# EAGLE board Friendship Pendant (EAGLE 9.5.1)
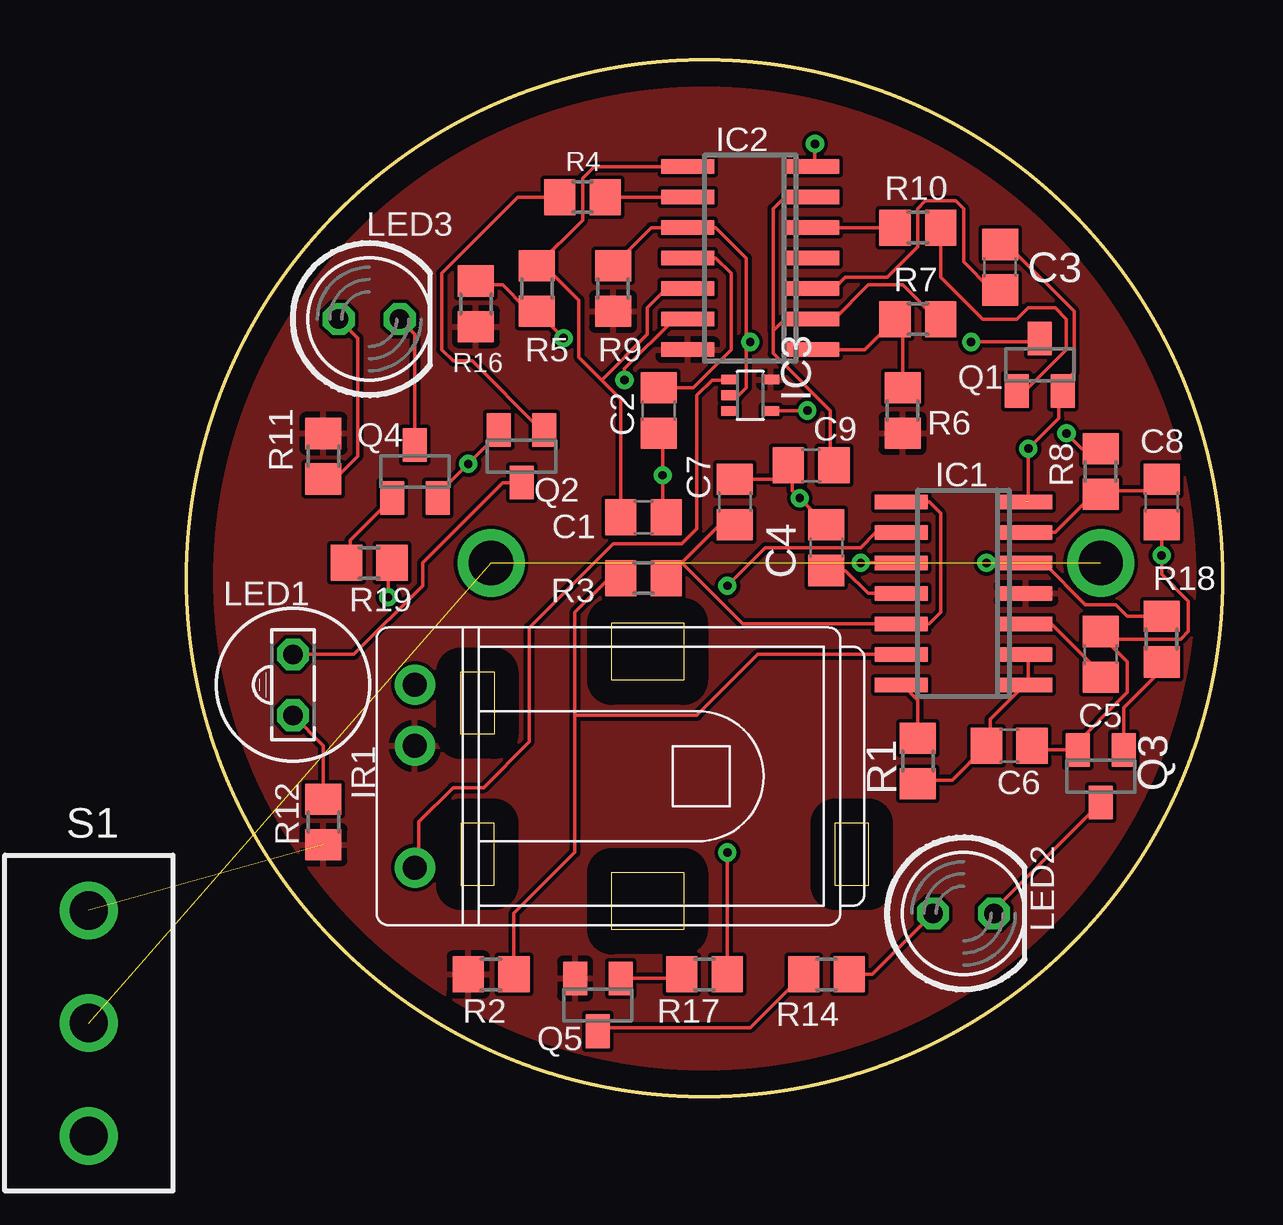
[diagram p0: board, top side]
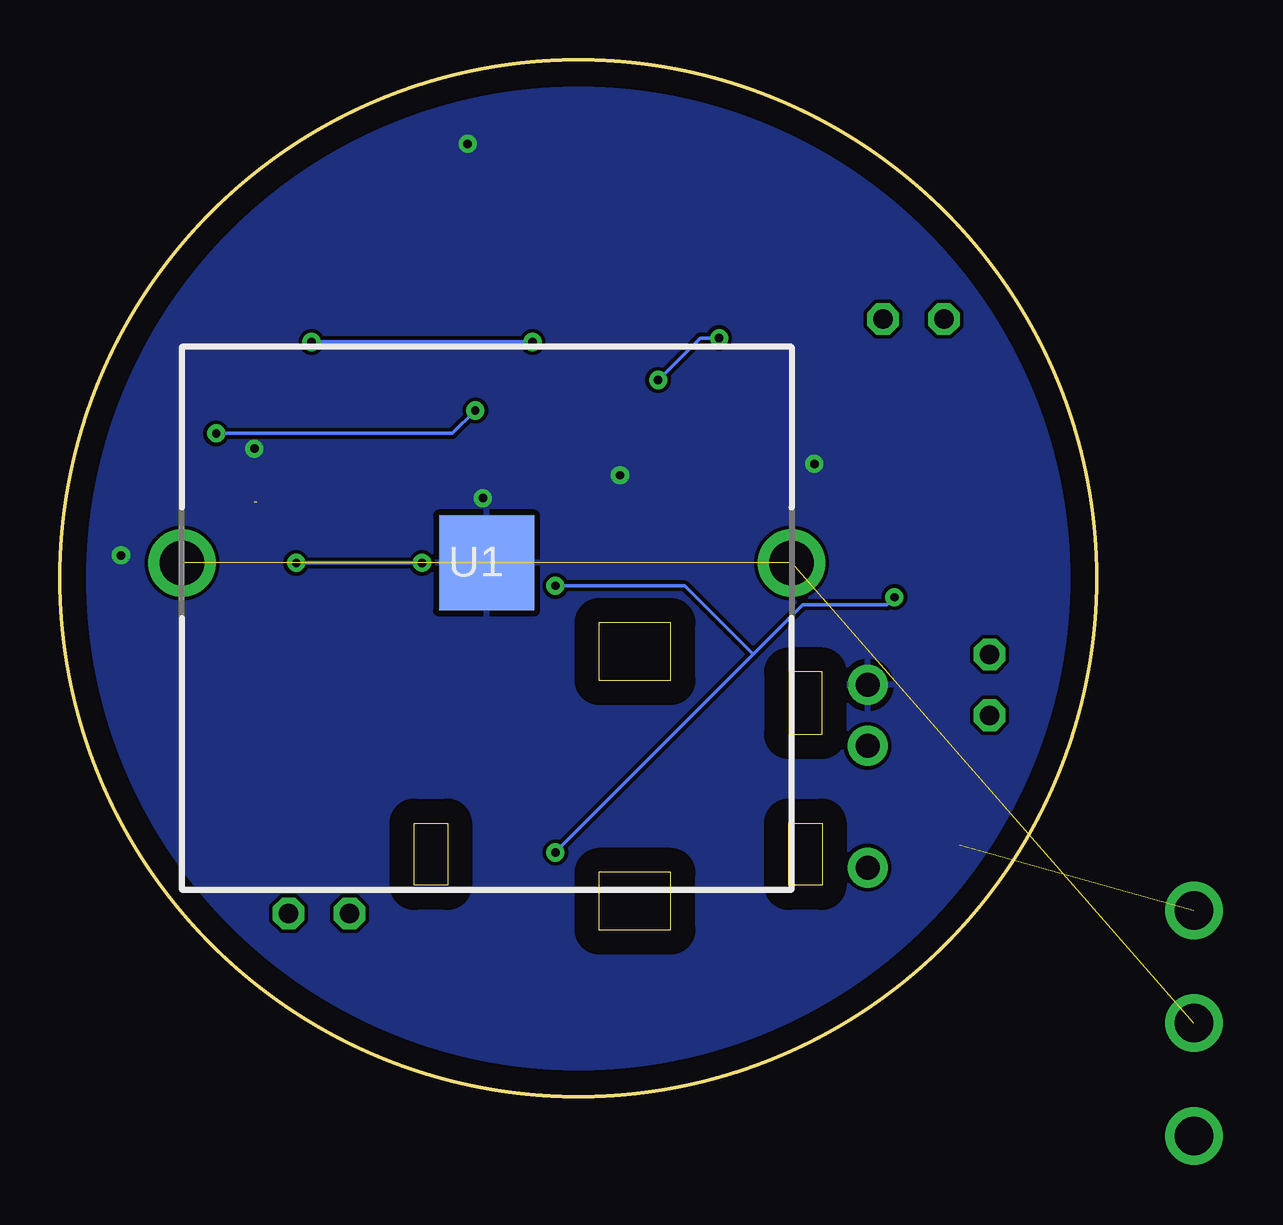
[diagram p1: board, bottom side, seen from below]

Size 43.18 x 43.18 mm. Coordinates in mm from the lower left corner, seen from the top.
Outline: circle at 21.59,21.59 radius 21.59
Copper layers (1*16): Top 0.035mm / dielectric 1.5mm / Bottom 0.035mm
Design rules "default": minimum track width 6mil, minimum drill 0.35mm, track to track 6mil, track to pad 6mil, pad to pad 6mil, via to via 6mil, smd to smd 6mil, copper to edge 40mil, drill to drill 6mil, minimum pad ring 10mil, minimum via ring 8mil, stop-mask expansion 4mil, vias tented up to drill 0mil, thermal gap 10mil

## Footprints (pad centres in the part's own frame; a part is rotated, then mirrored left to right if it is on the bottom)
C0805 = smd 1.3 x 1.5: 1 -0.95,0; 2 0.95,0
SO14 = smd 0.6 x 2.2: 1 -3.81,-2.6; 2 -2.54,-2.6; 3 -1.27,-2.6; 4 0,-2.6; 5 1.27,-2.6; 6 2.54,-2.6; 7 3.81,-2.6; 8 3.81,2.6; 9 2.54,2.6; 10 1.27,2.6; 11 0,2.6; 12 -1.27,2.6; 13 -2.54,2.6; 14 -3.81,2.6
SC70-5 = smd 0.4 x 0.7: 1 -0.65,-0.85; 2 0,-0.85; 3 0.65,-0.85; 4 0.65,0.85; 5 -0.65,0.85
TSOP17_TB1 = drill 1 pad 1.676: GND 0,-3.81; VO 0,3.81; VS 0,-1.27
IRL80A = drill 0.813 octagon: A 0,-1.27; K 0,1.27
LED5MM = drill 0.813 octagon: A -1.27,0; K 1.27,0
SOT23 = smd 1 x 1.4: 1 -0.95,-1.1; 2 0.95,-1.1; 3 0,1.1
R0805 = smd 1.3 x 1.5: 1 -0.95,0; 2 0.95,0
CS12ANW03 = drill 1.6 pad 2.37: 1 0,-4.7; 2 0,0; 3 0,4.7
3039 = drill 1.85 pad 2.8: 1 -12.7,0; 2 12.7,0 | smd 3.96 x 3.96: 3 0,0

## Placement (x,y rotation side)
C1  .01uF  [C0805]  19.05,24.13 0 top
C2  .01uF  [C0805]  19.68,28.58 270 top
C3  .01uF  [C0805]  33.91,34.54 90 top
C4  .01uF  [C0805]  26.67,22.86 90 top
C5  .01uF  [C0805]  38.1,18.42 90 top
C6  100uF  [C0805]  34.29,14.61 0 top
C7  100uF  [C0805]  22.86,24.77 90 top
C8  1uF  [C0805]  40.64,24.77 270 top
C9  4.7uF  [C0805]  26.04,26.29 180 top
IC1  LM556D  [SO14]  32.38,20.96 90 top
IC2  LM556D  [SO14]  23.5,34.92 90 top
IC3  74AHC1G32DCK  [SC70-5]  23.5,29.21 270 top
IR1  TSOP1730TB1  [TSOP17_TB1]  9.52,13.34 180 top
LED1  [IRL80A]  4.44,17.14 0 top
LED2  [LED5MM]  32.38,7.62 0 top
LED3  [LED5MM]  7.62,32.39 0 top
Q1  [SOT23]  35.56,30.48 0 top
Q2  [SOT23]  13.97,26.67 180 top
Q3  [SOT23]  38.1,13.34 180 top
Q4  [SOT23]  9.52,26.04 0 top
Q5  [SOT23]  17.14,3.81 180 top
R1  28.7K  [R0805]  30.48,13.97 90 top
R2  1.1K  [R0805]  12.7,5.08 180 top
R3  3.65K  [R0805]  19.05,21.59 180 top
R4  10K  [R0805]  16.51,37.47 180 top
R5  1.87K  [R0805]  14.61,33.66 270 top
R6  619K  [R0805]  29.84,28.58 270 top
R7  1.24K  [R0805]  30.48,32.39 180 top
R8  562  [R0805]  38.1,26.04 90 top
R9  1K  [R0805]  17.78,33.66 90 top
R10  10K  [R0805]  30.48,36.2 0 top
R11  30  [R0805]  5.71,26.67 90 top
R12  30  [R0805]  5.71,11.43 270 top
R14  15  [R0805]  26.67,5.08 180 top
R16  1K  [R0805]  12.07,33.02 90 top
R17  10K  [R0805]  21.59,5.08 180 top
R18  10K  [R0805]  40.64,19.05 270 top
R19  10K  [R0805]  7.62,22.23 180 top
S1  CS12ANW03  [CS12ANW03]  -4.06,3.05 0 top  (outside the outline)
U1  3039  [3039]  25.4,22.23 0 bottom

## Library data of the parts
C1 = rcl; MOUSER#: 603-CC0805JRX7R9BB103; MPN: CC0805JRX7R9BB103; SPICEPREFIX: C
C2-C5 = rcl; MOUSER#: 603-CC0805KRX7R9BB103; MPN: CC0805KRX7R9BB103; SPICEPREFIX: C
C6 C7 = rcl; MOUSER#: 81-GRM31CR60J107KE39L; MPN: GRM31CR60J107KE39L; SPICEPREFIX: C
C8 = rcl; MOUSER#: 80-C0805C105K3R; MPN: C0805C105K3R; SPICEPREFIX: C
C9 = rcl; MOUSER#: 791-0805X475M250CT; MPN: 0805X475M250CT; SPICEPREFIX: C
IC1 IC2 = linear
IC3 = 74xx-little-us; MOUSER#: 595-SN74AUP1G32DCKR; MPN: SN74AUP1G32DCKR
IR1 = telefunken; MOUSER#: 78-TSOP31330; MPN: TSOP31330; OC_FARNELL: unknown; OC_NEWARK: unknown
LED1 = led; MOUSER#: 782-TSAL6200; MPN: TSAL6200
LED2 = led; MOUSER#: 859-LTL-307GLC; MPN: LTL-307GLC
LED3 = led; MOUSER#: 645-521-9672F; MPN: 521-9672F
Q1-Q4 = semicon-smd-ipc; MOUSER#: 726-BCW66KHE6327HTSA1; MPN: BCW66KHE6327HTSA1; SPICEPREFIX: Q
Q5 = semicon-smd-ipc
R1 = rcl; MOUSER#: 652-CR0805-FX-2872ELF; MPN: CR0805-FX-2872ELF; SPICEPREFIX: R
R2 = rcl; MOUSER#: 652-CR0805-FX-1101ELF; MPN: CR0805-FX-1101ELF; SPICEPREFIX: R
R3 = rcl; MOUSER#: 652-CR0805-FX-3651ELF; MPN: CR0805-FX-3651ELF; SPICEPREFIX: R
R4 R10 R17-R19 = rcl; MOUSER#: 652-CR0805-FX-1002ELF; MPN: CR0805-FX-1002ELF; SPICEPREFIX: R
R5 = rcl; MOUSER#: 652-CR0805-FX-1871ELF; MPN: CR0805-FX-1871ELF; SPICEPREFIX: R
R6 = rcl; MOUSER#: 652-CR0805-FX-6193ELF; MPN: CR0805-FX-6193ELF; SPICEPREFIX: R
R7 = rcl; MOUSER#: 652-CR0805-FX-1241ELF; MPN: CR0805-FX-1241ELF; SPICEPREFIX: R
R8 = rcl; MOUSER#: 652-CR0805-FX-5620ELF; MPN: CR0805-FX-5620ELF; SPICEPREFIX: R
R9 R16 = rcl; MOUSER#: 652-CR0805-FX-1001ELF; MPN: CR0805-FX-1001ELF; SPICEPREFIX: R
R11 R12 = rcl; MOUSER#: 652-CR0805-JW-300ELF; MPN: CR0805-JW-300ELF; SPICEPREFIX: R
R14 = rcl; MOUSER#: 652-CR0805-FX-15R0ELF; MPN: CR0805-FX-15R0ELF; SPICEPREFIX: R
S1 = CS12ANW03; ALLIED_NUMBER: 70228233; ALLIED_PRICE-STOCK: https://www.alliedelec.com/nkk-switches-cs12anw03/70228233/; DESCRIPTION: NKK SWITCHES - CS12ANW03 - SWITCH, SLIDE, SPDT, 3A, 250V, TH; HEIGHT: mm; MANUFACTURER_NAME: NKK Switches; MANUFACTURER_PART_NUMBER: CS12ANW03; MOUSER_PART_NUMBER: 633-CS12ANW03; MOUSER_PRICE-STOCK: https://www.mouser.com/Search/Refine.aspx?Keyword=633-CS12ANW03; RS_PART_NUMBER: 1251847; RS_PRICE-STOCK: http://uk.rs-online.com/web/p/products/1251847
U1 = 3039; DESCRIPTION: Coin Cell Battery Holders THM COIN CELL CLIP; HEIGHT: mm; MANUFACTURER_NAME: Keystone Electronics; MANUFACTURER_PART_NUMBER: 3039; MOUSER_PART_NUMBER: 534-3039; MOUSER_PRICE-STOCK: https://www.mouser.com/Search/Refine.aspx?Keyword=534-3039

## Nets
0: C1.2 C2.2 C3.2 C4.2 C5.2 C6.2 C7.2 C8.2 C9.2 IC1.7 IC2.7 IR1.GND Q1.2 Q2.2 Q3.2 Q4.2 U1.3
BLINK: IC1.9 R17.1 R19.1
ENABLE: IC1.5 IC1.10 R18.1
GND: IC3.3
N$1: IC1.13 R2.1 R3.2
N$2: IC2.1 R6.1 R7.2
N$3: IC3.4 R8.2
N$4: IC2.10 IC3.2 Q1.3 R9.2
N$5: LED1.A R12.1
N$6: Q3.1 R18.2
N$7: Q4.1 R19.2
N$8: Q5.1 R17.2
N$9: LED1.K Q2.3
N$10: Q2.1 R4.2
N$11: IC3.1 IR1.VO
N$12: Q1.1 R10.2
N$13: IC2.5 R10.1
N$14: C3.1 IC2.3
N$15: S1.2 U1.1 U1.2
N$16: C9.1 IC2.2 IC2.6 R7.1
N$17: C8.1 IC1.6 R8.1
N$18: C5.1 IC1.3
N$19: C6.1 IC1.1 IC1.2 R1.1
N$21: IC1.14 R1.2
N$23: C4.1 IC1.11
N$24: C7.1 IC1.8 IC1.12 R3.1
N$27: LED3.A R11.1
N$28: LED3.K Q4.3
N$29: Q5.3 R14.2
N$30: LED2.A R14.1
N$31: LED2.K Q3.3
N$34: C2.1 IC2.11
N$35: C1.1 IC2.8 IC2.12 R5.1
N$36: IC2.13 R5.2 R16.2
SIGNAL: IC2.9 R4.1
VCC: IC1.4 IC2.14 IC3.5 IR1.VS Q5.2 R2.2 R6.2 R9.1 R11.2 R12.2 R16.1 S1.3

## Tracks (layer width: path | path; a pad name or v marks a point on that pad's centre or on a via)
0  (via drill 0.35)  (1 unrouted)
  Top 0.152: 35.08,24.77 v35.08,26.99 36.35,28.26 36.35,29.37 Q1.2 36.35,29.53 36.99,30.16 36.99,32.7 34.29,35.4 33.97,35.4 C3.2 | 25.24,25.72 25.24,26.19 C9.2 25.24,25.72 | 25.24,25.72 25.24,25.24 v25.56,24.92 C4.2 | 25.24,25.72 C7.2 | Q4.2 10.48,25.08 v11.75,26.35 13.02,27.62 Q2.2 | C1.2 19.84,24.13 v19.84,25.88 19.84,27.46 C2.2 | C8.2 v40.64,22.54 40.64,21.75 41.75,20.64 41.75,19.37 41.43,19.05 38.26,19.05 | 36.83,14.45 35.4,14.45 C6.2 | 36.83,14.45 Q3.2 36.83,14.45 | 38.26,19.05 39.21,18.1 39.21,16.83 36.83,14.45 | 38.26,19.05 38.1,19.21 C5.2 38.26,19.05 | v26.19,39.69 26.19,38.73 IC2.7
  pour Bottom: -0.25,21.72 -0.25,12.57 13.08,-0.76 30.23,-0.76 43.94,12.95 43.94,30.48 30.99,43.43 12.32,43.43 1.27,32.39 -0.25,30.86
BLINK  (via drill 0.35)
  Top 0.152: v22.54,10.16 R17.1 | v8.41,20.8 8.41,22.23 R19.1 | IC1.9 28.73,23.5 28.1,22.86 24.13,22.86 v22.54,21.27
  Bottom 0.152: 14.29,18.42 12.22,20.48 8.73,20.48 v8.41,20.8 | 14.29,18.42 v22.54,10.16 | v22.54,21.27 17.14,21.27 14.29,18.42
ENABLE  (via drill 0.35)
  Top 0.152: R18.1 39.21,20 38.73,20.48 37.47,20.48 35.72,22.23 IC1.5 v33.34,22.23 | v28.1,22.23 IC1.10
  Bottom 0.152: v33.34,22.23 v28.1,22.23
N$1
  Top 0.152: 16.19,15.88 16.19,20.16 17.62,21.59 R3.2 | 16.19,15.88 16.19,10.16 13.65,7.62 R2.1 | IC1.13 23.81,18.42 21.27,15.88 16.19,15.88
N$2
  Top 0.152: R6.1 29.84,32.23 29.69,32.39 R7.2 28.26,31.12 IC2.1
N$3  (via drill 0.35)
  Top 0.152: v25.88,28.58 24.45,28.58 IC3.4 | v36.67,27.62 37.31,26.99 R8.2
  Bottom 0.152: v25.88,28.58 26.83,27.62 v36.67,27.62
N$4  (via drill 0.35)
  Top 0.152: IC3.2 23.02,29.21 23.34,29.53 23.34,31.43 | 23.34,31.43 23.34,34.92 22.07,36.2 IC2.10 19.37,36.2 R9.2 | v32.7,31.43 35.56,31.43 Q1.3 | 23.34,31.43 v23.5,31.43
  Bottom 0.152: v23.5,31.43 v32.7,31.43
N$5
  Top 0.152: R12.1 5.71,14.61 LED1.A
N$6
  Top 0.152: R18.2 40.64,17.78 39.05,16.19 Q3.1
N$7
  Top 0.152: Q4.1 6.83,23.18 6.83,22.23 R19.2
N$8
  Top 0.152: Q5.1 20.48,4.92 R17.2
N$9
  Top 0.152: LED1.K 6.98,18.42 9.84,21.27 9.84,22.23 13.18,25.56 13.97,25.56 Q2.3
N$10
  Top 0.152: R4.2 13.81,37.47 10.64,34.29 10.64,31.12 11.11,30.64 11.91,30.64 14.76,27.78 Q2.1
N$11
  Top 0.152: IR1.VO 9.68,9.68 9.68,11.43 11.11,12.86 12.38,12.86 14.29,14.76 14.29,19.53 17.78,23.02 20.64,23.02 21.27,23.65 21.27,29.21 21.91,29.85 22.54,29.85 IC3.1
N$12
  Top 0.152: Q1.1 34.77,29.53 35.08,29.53 36.67,31.12 36.67,32.39 36.19,32.86 35.08,32.86 34.61,32.39 33.18,32.39 31.43,34.13 R10.2
N$13
  Top 0.152: IC2.5 R10.1
N$14
  Top 0.152: IC2.3 26.99,33.66 27.46,34.13 29.21,34.13 30.48,35.4 30.48,36.99 30.8,37.31 32.07,37.31 32.38,36.99 32.38,34.77 33.5,33.66 33.81,33.66 C3.1
N$15  (2 unrouted)
N$16
  Top 0.152: 24.45,31.91 24.45,30.96 26.83,28.58 26.83,26.35 C9.1 | 24.45,31.91 24.92,32.39 IC2.2 26.99,32.39 28.42,33.81 29.84,33.81 31.27,32.39 R7.1 | IC2.6 24.92,37.47 24.45,36.99 24.45,31.91
N$17
  Top 0.152: C8.1 40.64,25.56 40.32,25.24 38.1,25.24 R8.1 37.78,25.08 36.19,23.5 IC1.6
N$18
  Top 0.152: IC1.3 36.04,19.69 38.1,17.62 C5.1
N$19
  Top 0.152: IC1.2 35.08,18.42 35.08,17.14 IC1.1 34.92,17.14 33.5,15.72 33.5,14.61 C6.1 31.91,13.18 30.48,13.18 R1.1
N$21
  Top 0.152: R1.2 30.48,16.51 29.84,17.14 IC1.14
N$23
  Top 0.152: IC1.11 28.42,20.96 27.46,21.91 C4.1
N$24
  Top 0.152: 20.64,22.23 22.22,23.81 C7.1 | 20.64,22.23 R3.1 20.64,22.23 | IC1.8 30.96,24.77 31.43,24.29 31.43,20.16 30.96,19.69 IC1.12 23.18,19.69 20.64,22.23
N$27
  Top 0.152: LED3.A 7.14,31.59 7.14,26.67 6.35,25.88 5.71,25.88 R11.1
N$28
  Top 0.152: Q4.3 9.52,31.75 LED3.K
N$29
  Top 0.152: Q5.3 17.14,2.86 23.5,2.86 R14.2
N$30
  Top 0.152: R14.1 28.57,5.08 LED2.A
N$31
  Top 0.152: LED2.K 33.66,7.78 38.1,12.22 Q3.3
N$34
  Top 0.152: IC2.11 22.07,34.92 22.7,34.29 22.7,31.12 21.11,29.53 C2.1
N$35
  Top 0.152: 17.3,29.85 16.35,30.8 16.35,33.18 15.08,34.45 14.61,34.45 R5.1 16.51,36.51 16.51,38.26 16.99,38.73 IC2.8 | 17.3,29.85 18.1,29.05 C1.1 | IC2.12 20,33.66 19.21,32.86 19.21,31.75 17.3,29.85
N$36  (via drill 0.35)
  Top 0.152: R16.2 12.07,33.81 13.18,33.81 14.13,32.86 14.61,32.86 R5.2 v15.72,31.59 | IC2.13 20.32,32.39 18.26,30.32 v18.26,29.85
  Bottom 0.152: v18.26,29.85 16.51,31.59 v15.72,31.59
SIGNAL
  Top 0.152: IC2.9 R4.1
VCC  (1 unrouted)
  pour Top: 11.94,43.43 30.99,43.43 43.94,30.48 43.94,12.57 30.61,-0.76 13.08,-0.76 -0.25,12.57 -0.25,30.86 11.94,43.05